# EAGLE board M_3x4._v4 (EAGLE 9.6.2)
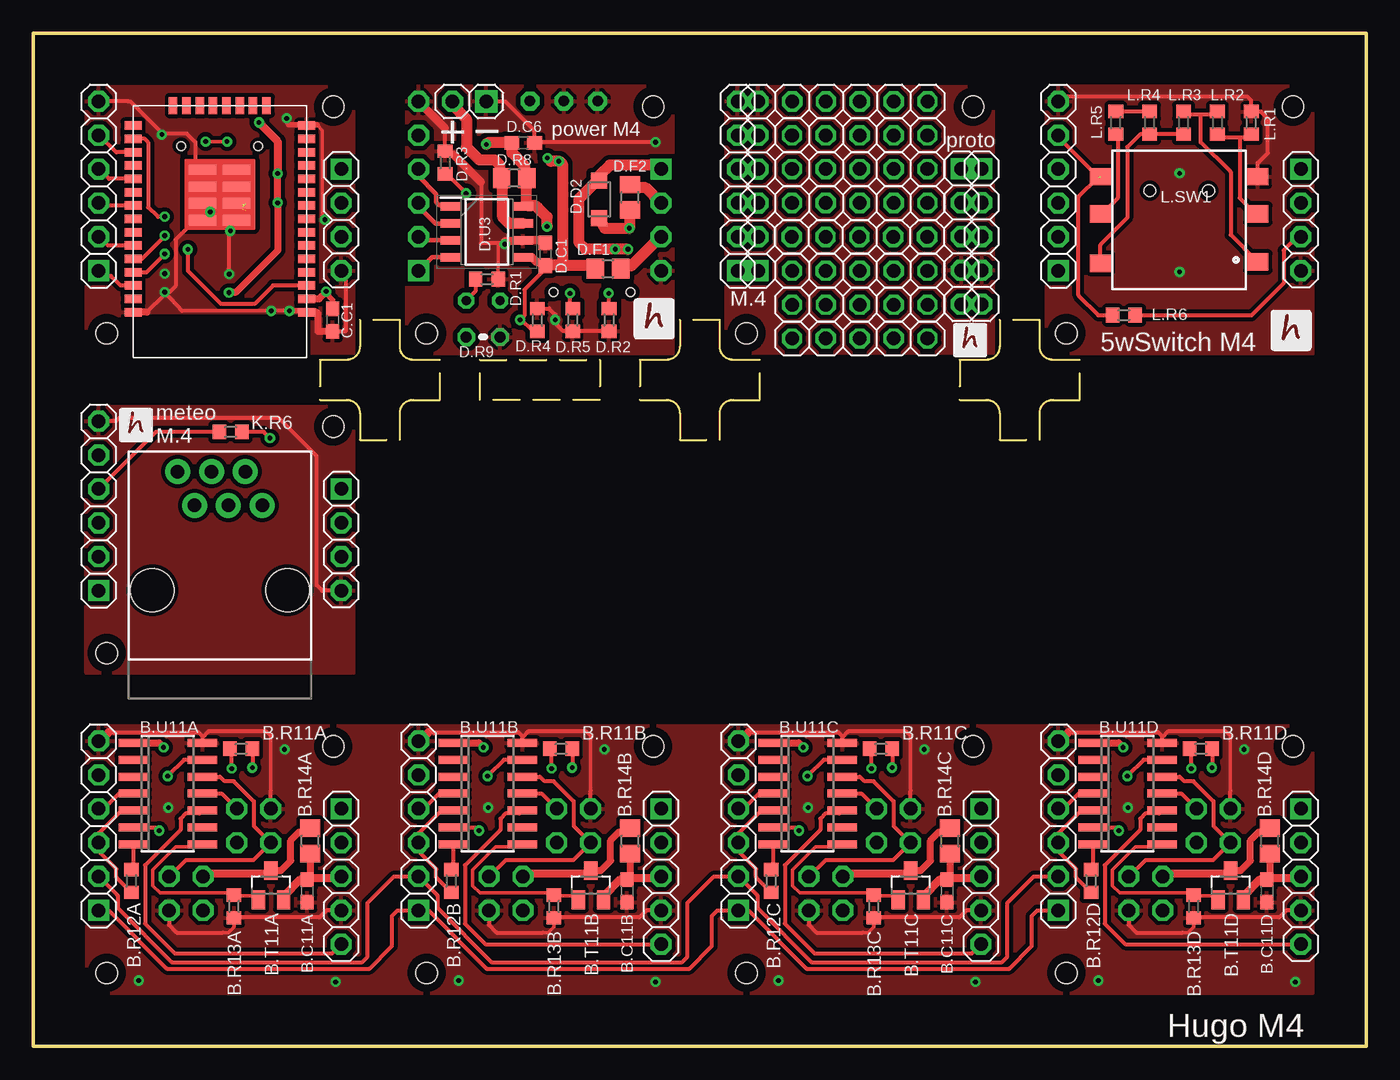
[diagram p0: board, top side]
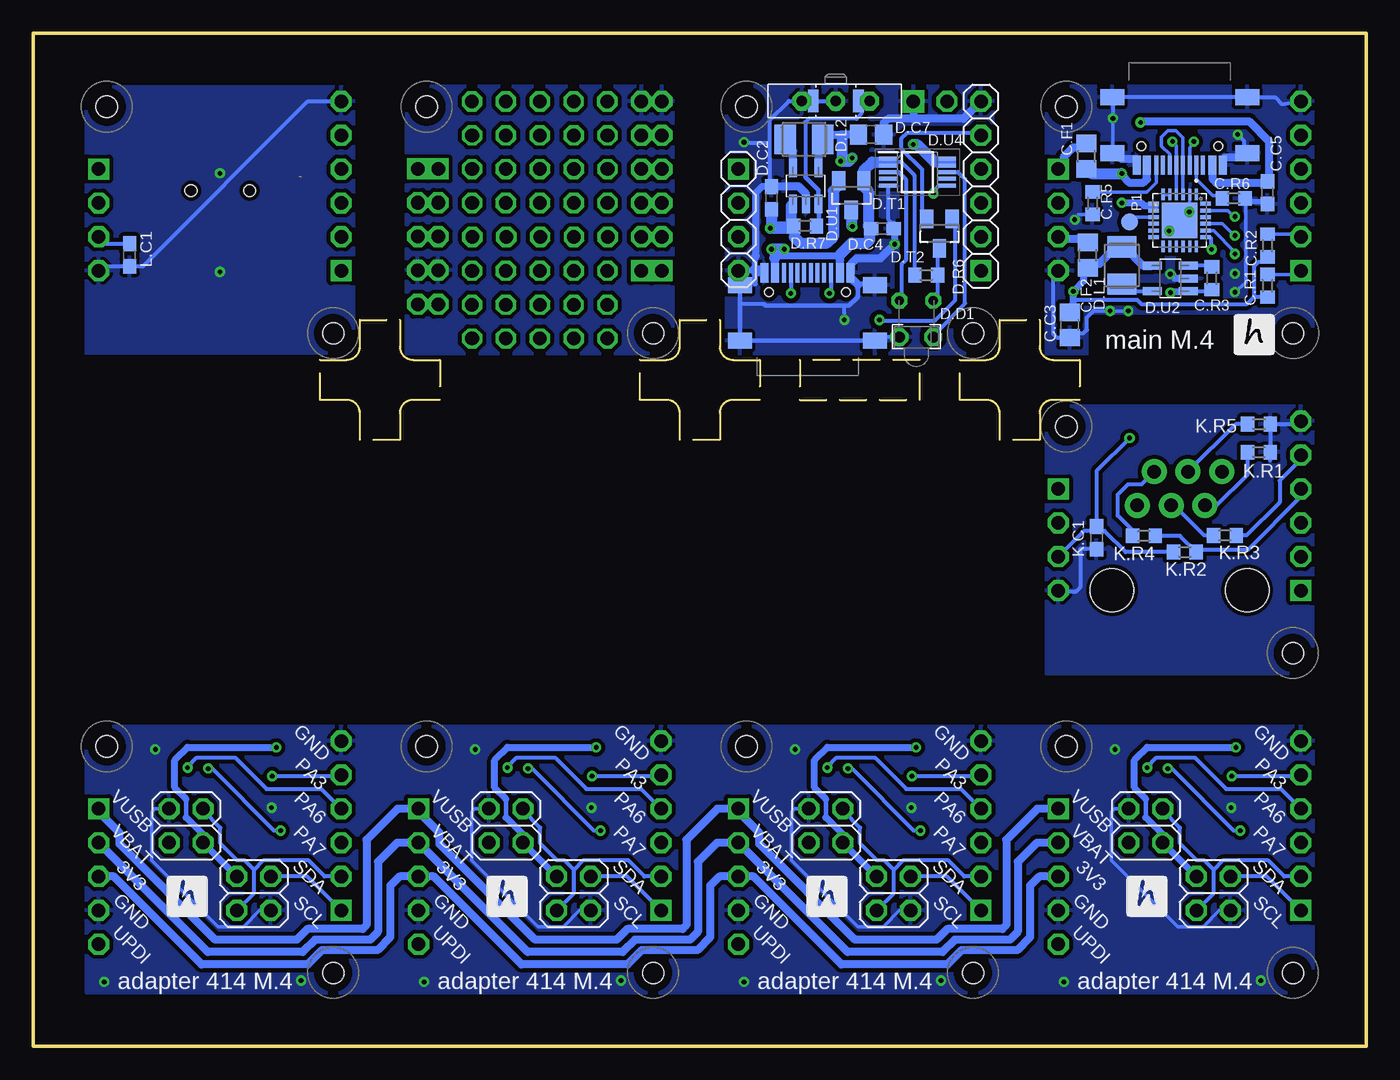
[diagram p1: board, bottom side, seen from below]

Size 100 x 76 mm. Coordinates in mm from the lower left corner, seen from the top.
Outline: 0,0 100,0 100,76 0,76 0,0
Copper layers (1*16): Top 0.035mm / dielectric 1.5mm / Bottom 0.035mm
Design rules "default *": minimum track width 10mil, minimum drill 0.35mm, track to track 6mil, track to pad 6mil, pad to pad 6mil, via to via 6mil, smd to smd 6mil, copper to edge 0mil, drill to drill 15mil, minimum pad ring 10mil, minimum via ring 8mil, stop-mask expansion 4mil, vias tented up to drill 0mil, thermal gap 10mil
Holes 1.6 mm at 5.5,53.5 22.5,70.5 29.5,53.5 46.5,70.5 70.5,70.5 53.5,53.5 77.5,53.5 94.5,70.5 22.5,46.5 5.5,29.5 77.5,5.5 94.5,22.5 5.5,5.5 22.5,22.5 29.5,5.5 46.5,22.5 53.5,5.5 70.5,22.5 77.5,5.5 94.5,22.5
tRestrict: area 21.5,69.5 to 23.5,71.5; area 4.5,52.5 to 6.5,54.5; area 45.5,69.5 to 47.5,71.5; area 28.5,52.5 to 30.5,54.5; area 69.5,69.5 to 71.5,71.5; area 52.5,52.5 to 54.5,54.5; area 93.5,69.5 to 95.5,71.5; area 76.5,52.5 to 78.5,54.5; area 21.5,45.5 to 23.5,47.5; area 4.5,28.5 to 6.5,30.5; area 21.5,21.5 to 23.5,23.5; area 4.5,4.5 to 6.5,6.5; 6 more areas
bRestrict: area 4.5,52.5 to 6.5,54.5; area 21.5,69.5 to 23.5,71.5; area 28.5,52.5 to 30.5,54.5; area 45.5,69.5 to 47.5,71.5; area 52.5,52.5 to 54.5,54.5; area 69.5,69.5 to 71.5,71.5; area 76.5,52.5 to 78.5,54.5; area 93.5,69.5 to 95.5,71.5; area 4.5,28.5 to 6.5,30.5; area 21.5,45.5 to 23.5,47.5; area 21.5,21.5 to 23.5,23.5; area 4.5,4.5 to 6.5,6.5; 6 more areas
Milling: 56 lines

## Footprints (pad centres in the part's own frame; a part is rotated, then mirrored left to right if it is on the bottom)
C0603 = smd 1.1 x 1: 1 -0.85,0; 2 0.85,0
1X06 = drill 1.016 pad 1.575 square: 1 -6.35,0 | drill 1.016 pad 1.575 octagon: 2 -3.81,0; 3 -1.27,0; 4 1.27,0; 5 3.81,0; 6 6.35,0
2X02 = drill 1.016 pad 1.575 octagon: 1 -1.27,-1.27; 2 -1.27,1.27; 3 1.27,-1.27; 4 1.27,1.27
1X05 = drill 1.016 pad 1.575 square: 1 -5.08,0 | drill 1.016 pad 1.575 octagon: 2 -2.54,0; 3 0,0; 4 2.54,0; 5 5.08,0
R0603 = smd 1 x 1.1: 1 -0.85,0; 2 0.85,0
FUSE = smd 1.3 x 1.5: 1 -0.95,0; 2 0.95,0
SO23 = smd 1 x 1.4: D 0,1.1; G -0.95,-1.1; S 0.95,-1.1
SO14 = smd 0.6 x 2.2: 1 -3.81,-2.6; 2 -2.54,-2.6; 3 -1.27,-2.6; 4 0,-2.6; 5 1.27,-2.6; 6 2.54,-2.6; 7 3.81,-2.6; 8 3.81,2.6; 9 2.54,2.6; 10 1.27,2.6; 11 0,2.6; 12 -1.27,2.6; 13 -2.54,2.6; 14 -3.81,2.6
C0805 = smd 1.3 x 1.5: 1 -0.95,0; 2 0.95,0
R0805 = smd 1.3 x 1.5: 1 -0.95,0; 2 0.95,0
TTGO-MICRO-32 = smd 1.27 x 0.635: 3V3 -6.5,5; EN -6.5,4; GND1 -6.5,6; GND2 -6.5,-8; GND3 6.5,6; IO0 6.5,-7; IO2 6.5,-8; IO4 6.5,-6; IO5 6.5,-3; IO12 -6.5,-7; IO14 -6.5,-6; IO16 6.5,-5; IO17 6.5,-4; IO18 6.5,-2; IO19 6.5,-1; IO21 6.5,1; IO22 6.5,4; IO23 6.5,5; IO25 -6.5,-3; IO26 -6.5,-4; IO27 -6.5,-5; IO32 -6.5,-1; IO33 -6.5,-2; IO34 -6.5,1; IO35 -6.5,0; NC 6.5,0; RXD0 6.5,2; TXD0 6.5,3; VN -6.5,2; VP -6.5,3 | smd 0.635 x 1.27: CLK 0.5,-9.5; CMD -0.5,-9.5; IO13 -3.5,-9.5; IO15 3.5,-9.5; SD0 1.5,-9.5; SD1 2.5,-9.5; SD2 -2.5,-9.5; SD3 -1.5,-9.5 | smd 2.032 x 0.762: GND4 -1.27,-0.889; GND5 1.27,-0.889; GND6 -1.27,-2.159; GND7 1.27,-2.159; GND8 -1.27,-3.429; GND9 -1.27,-4.699; GND10 1.27,-3.429; GND11 1.27,-4.699
LED_1.8 = drill 0.7 octagon: 1 -1.27,-0.4; 2 1.27,-0.4
SHOTKY_2.8 = smd 1.2 x 1.2: A -1.4,0; K 1.4,0
1X04 = drill 1.016 pad 1.575 square: 1 -3.81,0 | drill 1.016 pad 1.575 octagon: 2 -1.27,0; 3 1.27,0; 4 3.81,0
L3230M = smd 1.6 x 2.2: 1 -1.4,0; 2 1.4,0
1X02 = drill 1.016 pad 1.676 square: 1 -1.27,0 | drill 1.016 pad 1.575 octagon: 2 1.27,0
SWITCH = drill 0.8 pad 1.422 octagon: P$1 -2.54,0; P$2 0,0; P$3 2.54,0 | smd 0.8 x 1.7: P$4 -1.7,0; P$5 1.7,0
THERM = drill 0.813 octagon: 1 -1.27,0; 2 1.27,0
SOT32-5 = smd 0.6 x 1.4: BP 0.95,1.35; GND 0,-1.35; SHDN 0.95,-1.35; VIN -0.95,-1.35; VOUT -0.95,1.35
SOIC127P600X175-8N = smd 1.528 x 0.65: 1 -2.711,1.905; 2 -2.711,0.635; 3 -2.711,-0.635; 4 -2.711,-1.905; 5 2.711,-1.905; 6 2.711,-0.635; 7 2.711,0.635; 8 2.711,1.905
SOP50P490X110-10N = smd 1.4 x 0.3: 1 -2.2,1; 2 -2.2,0.5; 3 -2.2,0; 4 -2.2,-0.5; 5 -2.2,-1; 6 2.2,-1; 7 2.2,-0.5; 8 2.2,0; 9 2.2,0.5; 10 2.2,1
RJ11-6 = drill 1.016 pad 1.88: 1 -3.175,8.89; 2 -1.905,6.35; 3 -0.635,8.89; 4 0.635,6.35; 5 1.905,8.89; 6 3.175,6.35 | hole 3.251: -5.08,0; 5.08,0
5_WAY_SWITCH = smd 1.6 x 1.3: 1 -6,3; 2 -6,0.2; 3 -6,-3.5; 4 5.8,3; 5 5.8,0.2; 6 5.8,-3.4 | hole 0.9: 2.1,1.95; -2.3,1.95
B1,27 = smd 1.27 x 1.27: TP 0,0
QFN50P400X400X80-25N = smd 0.81 x 0.26: 1 -1.955,1.25; 2 -1.955,0.75; 3 -1.955,0.25; 4 -1.955,-0.25; 5 -1.955,-0.75; 6 -1.955,-1.25; 13 1.955,-1.25; 14 1.955,-0.75; 15 1.955,-0.25; 16 1.955,0.25; 17 1.955,0.75; 18 1.955,1.25 | smd 0.26 x 0.81: 7 -1.25,-1.955; 8 -0.75,-1.955; 9 -0.25,-1.955; 10 0.25,-1.955; 11 0.75,-1.955; 12 1.25,-1.955; 19 1.25,1.955; 20 0.75,1.955; 21 0.25,1.955; 22 -0.25,1.955; 23 -0.75,1.955; 24 -1.25,1.955 | smd 2.68 x 2.68: 25 0,0
USB-C = smd 0.6 x 1.45: A1B12 -3.235,3.825; A4B9 -2.46,3.825; B1A12 3.215,3.825; B4A9 2.44,3.825 | smd 0.3 x 1.45: A5 -1.26,3.825; A6 -0.26,3.825; A7 0.24,3.825; A8 1.24,3.825; B5 1.74,3.825; B6 0.74,3.825; B7 -0.76,3.825; B8 -1.76,3.825 | smd 1.8 x 1.2: SH1 -5.08,2.91; SH2 -5.08,-1.27; SH3 5.06,-1.27; SH4 5.06,2.91 | hole 0.65: 2.88,2.38; -2.9,2.38
1X5_AUTO = drill 1.016 octagon: 1 -5.08,0; 2 -2.54,0; 3 0,0; 4 2.54,0; 5 5.08,0

## Placement (x,y rotation side)
B.C11A  100n  [C0603]  20.54,11.65 270 top
B.C11B  100n  [C0603]  44.54,11.65 270 top
B.C11C  100n  [C0603]  68.54,11.65 270 top
B.C11D  100n  [C0603]  92.54,11.65 270 top
B.J1  [1X06]  28.9,16.54 90 top
B.J2  [2X02]  35.46,11.46 270 bottom
B.J3  [2X02]  40.54,16.54 270 bottom
B.J4  [1X05]  47.1,12.73 270 top
B.J5  [1X06]  52.9,16.54 90 top
B.J6  [2X02]  59.46,11.46 270 bottom
B.J7  [2X02]  64.54,16.54 270 bottom
B.J8  [1X05]  71.1,12.73 270 top
B.J9  [1X06]  76.9,16.54 90 top
B.J10  [2X02]  83.46,11.46 270 bottom
B.J11  [1X05]  23.1,12.73 270 top
B.J12  [1X06]  4.9,16.54 90 top
B.J13  [2X02]  11.46,11.46 270 bottom
B.J14  [2X02]  16.54,16.54 270 bottom
B.J15  [2X02]  88.54,16.54 270 bottom
B.J16  [1X05]  95.1,12.73 270 top
B.R11A  alt RX 0R  [R0603]  15.59,22.32 180 top
B.R11B  alt RX 0R  [R0603]  39.59,22.32 180 top
B.R11C  alt RX 0R  [R0603]  63.59,22.32 180 top
B.R11D  alt RX 0R  [R0603]  87.59,22.32 180 top
B.R12A  alt TX 0R  [R0603]  7.36,12.39 90 top
B.R12B  alt TX 0R  [R0603]  31.36,12.39 90 top
B.R12C  alt TX 0R  [R0603]  55.36,12.39 90 top
B.R12D  alt TX 0R  [R0603]  79.36,12.39 90 top
B.R13A  100k  [R0603]  15.06,10.48 270 top
B.R13B  100k  [R0603]  39.06,10.48 270 top
B.R13C  100k  [R0603]  63.06,10.48 270 top
B.R13D  100k  [R0603]  87.06,10.48 270 top
B.R14A  alt fuse or 0R  [FUSE]  20.77,15.4 90 top
B.R14B  alt fuse or 0R  [FUSE]  44.77,15.4 90 top
B.R14C  alt fuse or 0R  [FUSE]  68.77,15.4 90 top
B.R14D  alt fuse or 0R  [FUSE]  92.77,15.4 90 top
B.T11A  NX3008  [SO23]  17.83,12.09 0 top
B.T11B  NX3008  [SO23]  41.83,12.09 0 top
B.T11C  NX3008  [SO23]  65.83,12.09 0 top
B.T11D  NX3008  [SO23]  89.83,12.09 0 top
B.U11A  AT414  [SO14]  10.09,18.95 270 top
B.U11B  AT414  [SO14]  34.09,18.95 270 top
B.U11C  AT414  [SO14]  58.09,18.95 270 top
B.U11D  AT414  [SO14]  82.09,18.95 270 top
C.C1  100n  [C0603]  22.46,54.48 270 top
C.C3  22u  [C0805]  22.25,54.12 270 bottom
C.C5  1u  [C0603]  7.41,64.05 90 bottom
C.F1  0.5A  [R0805]  20.98,66.78 90 bottom
C.F2  0.5A  [R0805]  20.88,59.35 90 bottom
C.J2  [1X06]  4.9,64.54 90 top
C.R1  2k2  [R0603]  7.41,57.06 270 bottom
C.R2  2k2  [R0603]  7.41,60.08 270 bottom
C.R3  100k  [R0603]  11.58,57.62 270 bottom
C.R5  5K1  [R0603]  20.53,63.26 90 bottom
C.R6  5k1  [R0603]  9.95,63.61 180 bottom
C.U1  TTGO-MICRO-32  [TTGO-MICRO-32]  13.99,61.08 180 top
D.C1  100n  [C0603]  38.42,59.42 270 top
D.C2  4u7  [C0603]  44.62,63.64 270 bottom
D.C4  4u7  [C0603]  36.3,61.35 180 bottom
D.C6  4u7  [C0603]  36.75,67.79 180 top
D.C7  10u  [C0805]  37.14,68.4 180 bottom
D.D1  LED_1.8_FLIPPED  [LED_1.8]  33.75,55.55 180 bottom
D.D2  SHOTKY_2.8  [SHOTKY_2.8]  42.46,63.54 270 top
D.F1  0.5A  [R0805]  43.11,58.35 0 top
D.F2  1.1A  [R0805]  44.76,63.7 90 top
D.J2  [1X06]  28.9,64.54 90 bottom
D.J3  [1X04]  47.1,62 270 bottom
D.L1  2u2  [L3230M]  18.33,58.59 90 bottom
D.L2  2u2  [L3230M]  42.18,68.04 0 bottom
D.LIPOL  [1X02]  32.71,70.89 180 top
D.ON/OFF/RESET  SWITCH  [SWITCH]  39.8,70.92 0 bottom
D.R1  4k7  [R0603]  34.03,57.55 180 top
D.R2  5k1  [R0603]  43.2,54.5 270 top
D.R3  I=1/R (4k7 for 213mA, 2k2 for455mA )  [R0603]  30.9,66.31 270 top
D.R4  100k  [R0603]  37.81,54.5 90 top
D.R5  5k1  [R0603]  40.46,54.5 270 top
D.R6  3k3  [R0603]  33.01,57.85 180 bottom
D.R7  390k  [R0603]  42.1,61.53 0 bottom
D.R8  0.1  [R0805]  36.08,65.14 180 top
D.R9  TERM_10K  [THERM]  33.75,53.21 180 top
D.T1  FDV304  [SO23]  38.63,63.84 180 bottom
D.T2  NX3008  [SO23]  32.02,60.97 180 bottom
D.U1  LM3671_3.3  [SOT32-5]  42.04,64.55 0 bottom
D.U2  LM3671_3.3  [SOT32-5]  14.7,57.61 90 bottom
D.U3  INA219AIDR  [SOIC127P600X175-8N]  34.03,61.1 0 top
D.U4  MCP73833-AMI_UN  [SOP50P490X110-10N]  33.67,65.59 0 bottom
G.J1  [1X06]  76.9,64.54 90 top
G.J2  [1X04]  95.1,62 270 top
I.J3  [1X04]  23.1,38 270 top
J1  RJ11  [RJ11-6]  14,34.22 0 top
JP1  [1X04]  23.1,62 270 top
JP2  [1X06]  52.85,64.54 90 top
JP3  [1X06]  54.37,64.54 90 top
JP4  [1X05]  69.63,60.76 270 top
JP5  [1X06]  4.9,40.54 90 top
JP11  [1X05]  71.15,60.76 270 top
K.C1  100n  [C0603]  20.24,38.14 270 bottom
K.R1  1k  [R0603]  8.05,44.57 180 bottom
K.R2  4k7  [R0603]  13.61,37.08 0 bottom
K.R3  1k  [R0603]  10.6,38.32 180 bottom
K.R4  1k  [R0603]  16.67,38.3 180 bottom
K.R5  1k  [R0603]  8.04,46.68 180 bottom
K.R6  4k7  [R0603]  14.8,46.09 180 top
L.C1  100n  [C0603]  92.77,59.37 90 bottom
L.R1  1k  [R0603]  91.38,69.28 90 top
L.R2  1k  [R0603]  88.83,69.28 270 top
L.R3  2k2  [R0603]  86.3,69.28 90 top
L.R4  2k2  [R0603]  83.75,69.28 270 top
L.R5  2k2  [R0603]  81.22,69.28 270 top
L.R6  2k2  [R0603]  81.82,54.85 0 top
L.SW1  5_WAY_SWITCH  [5_WAY_SWITCH]  86.07,62.24 0 top
P1  TPB1,27  [B1,27]  17.74,61.87 0 bottom
U1  CP2104-F03-GM  [QFN50P400X400X80-25N]  13.99,61.96 270 bottom
U$1  USB-C  [USB-C]  14,69.93 180 bottom
U$2  USB-C  [USB-C]  41.91,54.2 0 bottom
U$3  PINHD-1X5_AUTO  [1X5_AUTO]  62.01,70.89 0 top
U$4  PINHD-1X5_AUTO  [1X5_AUTO]  62,68.35 0 top
U$5  PINHD-1X5_AUTO  [1X5_AUTO]  62,65.81 0 top
U$6  PINHD-1X5_AUTO  [1X5_AUTO]  62,63.27 0 top
U$7  PINHD-1X5_AUTO  [1X5_AUTO]  61.97,60.73 0 top
U$8  PINHD-1X5_AUTO  [1X5_AUTO]  62,58.19 0 top
U$9  PINHD-1X5_AUTO  [1X5_AUTO]  62,55.64 0 top
U$10  PINHD-1X5_AUTO  [1X5_AUTO]  62,53.1 0 top

## Library data of the parts
B.C11A B.C11B B.C11C B.C11D C.C1 C.C3 C.C5 D.C1 D.C2 D.C4 D.C6 D.C7 K.C1 L.C1 = rcl; SPICEPREFIX: C
B.J1-B.J16 C.J2 D.J2 D.J3 D.LIPOL G.J1 G.J2 I.J3 JP1-JP5 JP11 U$3-U$10 = pinhead2
B.R11A B.R11B B.R11C B.R11D B.R12A B.R12B B.R12C B.R12D B.R13A B.R13B B.R13C B.R13D C.F1 C.F2 C.R1-C.R3 C.R5 C.R6 D.F1 D.F2 D.R1-D.R8 K.R1-K.R6 L.R1-L.R6 = rcl; SPICEPREFIX: R
B.R14A B.R14B B.R14C B.R14D B.T11A B.T11B B.T11C B.T11D C.U1 D.D1 D.D2 D.ON/OFF/RESET D.R9 D.T1 D.T2 L.SW1 U$1 U$2 = hugo
B.U11A B.U11B B.U11C B.U11D = atmel
D.L1 D.L2 = rcl; SPICEPREFIX: L
D.U1 D.U2 = !stavebnice03
D.U3 = SamacSys_Parts; DESCRIPTION: 26-V, Bidirectional, Zero-Drift, High-Side, I2C Out Current/Power Monitor; HEIGHT: 1.75mm; MANUFACTURER_NAME: Texas Instruments; MANUFACTURER_PART_NUMBER: INA219AIDR; MOUSER_PART_NUMBER: 595-INA219AIDR; MOUSER_PRICE-STOCK: https://www.mouser.co.uk/ProductDetail/Texas-Instruments/INA219AIDR?qs=XGzIaZb%2FFYIE5YcOHTnKDA%3D%3D
D.U4 = SamacSys_Parts; DESCRIPTION: Microchip MCP73833-AMI/UN, Battery Charge Controller Lithium-Ion, Lithium-Polymer, 10-Pin MSOP; HEIGHT: 1.1mm; MANUFACTURER_NAME: Microchip; MANUFACTURER_PART_NUMBER: MCP73833-AMI/UN; MOUSER_PART_NUMBER: 579-MCP73833-AMI/UN; MOUSER_PRICE-STOCK: https://www.mouser.co.uk/ProductDetail/Microchip-Technology/MCP73833-AMI-UN?qs=Fxu3fLyJv8fd%2FGnsUSC9lg%3D%3D
J1 = SparkFun-Connectors; PROD_ID: CONN-08590; SF_ID: PRT-00132
P1 = testpad
U1 = CP2104; AVAILABILITY: Unavailable; DESCRIPTION: USB Bridge, USB to UART USB 2.0 UART Interface 24-QFN (4x4); MF: Silicon Labs; MP: CP2104; PACKAGE: QFN-24 Silicon Labs; PRICE: None

## Nets
3V3F: D.F1.2 D.J3.3
GND: C.C1.2 C.C3.2 C.C5.1 C.J2.6 C.R5.1 C.R6.1 C.U1.GND1 C.U1.GND2 C.U1.GND3 C.U1.GND4 C.U1.GND5 C.U1.GND6 C.U1.GND7 C.U1.GND8 C.U1.GND9 C.U1.GND10 C.U1.GND11 D.U2.GND JP1.4 U1.2 U1.25 U$1.A1B12 U$1.B1A12 U$1.SH1 U$1.SH2 U$1.SH3 U$1.SH4
GND1: D.C1.1 D.C2.1 D.C4.1 D.C6.1 D.C7.1 D.J2.6 D.J3.4 D.LIPOL.1 D.ON/OFF/RESET.P$1 D.ON/OFF/RESET.P$2 D.ON/OFF/RESET.P$4 D.R1.1 D.R2.2 D.R3.1 D.R4.2 D.R5.2 D.R9.1 D.U1.GND D.U3.6 D.U4.5 U$2.A1B12 U$2.B1A12 U$2.SH1 U$2.SH2 U$2.SH3 U$2.SH4
GND2: JP2.6 JP3.6 JP4.4 JP11.4
GND3: G.J1.6 G.J2.4 L.C1.1 L.R1.2 L.SW1.4
GND4: I.J3.4 JP5.6 K.C1.2 K.R1.1 K.R5.1
GND6: B.C11A.2 B.C11B.2 B.C11C.2 B.C11D.2 B.J1.6 B.J2.4 B.J3.1 B.J4.4 B.J5.6 B.J6.4 B.J7.1 B.J8.4 B.J9.6 B.J10.4 B.J11.4 B.J12.6 B.J13.4 B.J14.1 B.J15.1 B.J16.4 B.R13A.2 B.R13B.2 B.R13C.2 B.R13D.2 B.U11A.14 B.U11B.14 B.U11C.14 B.U11D.14
IN+: D.LIPOL.2 D.R8.2 D.U3.7
IN-: D.C6.2 D.R8.1 D.T1.D D.U3.8 D.U4.9 D.U4.10
N$1: U1.4 U$1.A7 U$1.B7
N$2: U1.3 U$1.A6 U$1.B6
N$3: C.R6.2 U$1.A5
N$4: C.R5.2 U$1.B5
N$5: C.F2.2 JP1.3
N$6: C.F1.2 JP1.1
N$7: P1.TP U1.9
N$8: U1.5 U1.6
N$9: D.L2.1 D.U1.VOUT
N$10: D.L1.1 D.U2.VOUT
N$11: C.R3.1 D.U2.SHDN
N$12: C.J2.5 C.U1.IO4
N$13: C.J2.4 C.U1.IO17
N$14: C.J2.3 C.U1.IO18
N$15: D.ON/OFF/RESET.P$3 D.ON/OFF/RESET.P$5 D.R7.2 D.U1.SHDN
N$16: D.R5.1 U$2.B5
N$17: D.R2.1 U$2.A5
N$18: D.R3.2 D.U4.6
N$19: D.R9.2 D.U4.8
N$20: D.J2.5 D.T2.S
N$21: JP2.5 JP3.5
N$22: JP2.4 JP3.4
N$24: JP2.3 JP3.3
N$25: JP2.2 JP3.2
N$27: JP2.1 JP3.1
N$28: JP4.5 JP11.5
N$29: JP4.2 JP11.2
N$30: JP4.1 JP11.1
N$31: JP4.3 JP11.3
N$32: L.R1.1 L.R2.2 L.SW1.5
N$33: L.R2.1 L.R3.2 L.SW1.6
N$34: L.R3.1 L.R4.2 L.SW1.3
N$35: L.R5.2 L.SW1.2
N$36: G.J1.5 L.R6.1 L.SW1.1
N$37: L.R4.1 L.R5.1
N$38: JP5.5 K.R3.1
N$39: JP5.4 K.R2.2 K.R4.1 K.R6.2
N$40: J1.5 K.R4.2
N$41: J1.4 K.R3.2
N$42: J1.3 K.R5.2
N$43: J1.2 K.R1.2
N$44: B.R12A.2 B.U11A.7
N$45: B.R11A.2 B.U11A.6
N$46: B.R13A.1 B.T11A.G B.U11A.8
N$47: B.R12C.2 B.U11C.7
N$48: B.C11A.1 B.C11B.1 B.C11C.1 B.C11D.1 B.J4.3 B.J8.3 B.J11.3 B.J16.3 B.R14A.1 B.R14B.1 B.R14C.1 B.R14D.1 B.T11A.S B.T11B.S B.T11C.S B.T11D.S
N$49: B.R12B.2 B.U11B.7
N$50: B.R11B.2 B.U11B.6
N$51: B.R13B.1 B.T11B.G B.U11B.8
N$52: B.R11C.2 B.U11C.6
N$53: B.R13C.1 B.T11C.G B.U11C.8
N$55: B.R12D.2 B.U11D.7
N$56: B.R11D.2 B.U11D.6
N$57: B.R13D.1 B.T11D.G B.U11D.8
PA1: B.J12.5 B.U11A.13
PA2: B.J12.4 B.R11A.1 B.U11A.4
PA3: D.D1.1 D.R1.2 D.R6.1 D.T2.D
PA4: B.J12.3 B.R12A.1 B.U11A.5
PA5: B.J1.5 B.U11B.13
PA6: D.J2.4 D.U3.1
PA7: D.J2.3 D.U3.2
PA8: B.J1.4 B.R11B.1 B.U11B.4
PA9: B.J1.3 B.R12B.1 B.U11B.5
PA10: B.J5.5 B.U11C.13
PA11: B.J5.4 B.R11C.1 B.U11C.4
PA12: B.J5.3 B.R12C.1 B.U11C.5
PA13: B.J9.5 B.U11D.13
PA14: B.J9.4 B.R11D.1 B.U11D.4
PA15: B.J9.3 B.R12D.1 B.U11D.5
PROG: C.U1.IO0 U1.23
RESET: C.U1.EN U1.19
RX: C.U1.TXD0 U1.20
SCL: C.J2.1 C.R1.1 C.U1.IO22
SCL1: D.J2.1 D.U3.4
SCL2: B.J1.1 B.J2.2 B.J3.3 B.J5.1 B.J6.2 B.J7.3 B.J9.1 B.J10.2 B.J12.1 B.J13.2 B.J14.3 B.J15.3 B.U11A.12 B.U11B.12 B.U11C.12 B.U11D.12
SDA: C.J2.2 C.R2.1 C.U1.IO21
SDA1: D.J2.2 D.U3.3
SDA2: B.J1.2 B.J2.3 B.J3.2 B.J5.2 B.J6.3 B.J7.2 B.J9.2 B.J10.3 B.J12.2 B.J13.3 B.J14.2 B.J15.2 B.U11A.11 B.U11B.11 B.U11C.11 B.U11D.11
STAT1: D.D1.2 D.U4.3
TX: C.U1.RXD0 U1.21
UPDI: B.J11.5 B.U11A.10
UPDI1: B.J4.5 B.U11B.10
UPDI2: B.J8.5 B.U11C.10
UPDI3: B.J16.5 B.U11D.10
VBAT: B.J4.2 B.J8.2 B.J11.2 B.J16.2
VBATF: D.F2.2 D.J3.2
VCC: C.C1.1 C.C3.1 C.F2.1 C.R1.2 C.R2.2 C.U1.3V3 D.L1.2 D.U2.BP
VCC1: D.C1.2 D.C7.2 D.F1.1 D.L2.2 D.R4.1 D.T2.G D.U1.BP D.U3.5
VCC2: G.J2.3 L.C1.2 L.R6.2
VCC3: I.J3.3 K.C1.1 K.R2.1 K.R6.1
VCC4: B.J13.1 B.J14.4 B.R14A.2 B.T11A.D B.U11A.1
VCC5: B.J2.1 B.J3.4 B.R14B.2 B.T11B.D B.U11B.1
VCC6: B.J6.1 B.J7.4 B.R14C.2 B.T11C.D B.U11C.1
VCC7: B.J10.1 B.J15.4 B.R14D.2 B.T11D.D B.U11D.1
VMOT: D.C2.2 D.D2.K D.F2.1 D.R7.1 D.T1.S D.U1.VIN
VUSB: C.C5.2 C.F1.1 C.R3.2 D.U2.VIN U1.7 U1.8 U$1.A4B9 U$1.B4A9
VUSB1: D.C4.2 D.D2.A D.J3.1 D.R6.2 D.T1.G D.U4.1 D.U4.2 U$2.A4B9 U$2.B4A9
VUSB2: B.J4.1 B.J8.1 B.J11.1 B.J16.1

## Tracks (layer width: path | path; a pad name or v marks a point on that pad's centre or on a via)
3V3F
  Top 0.813: D.F1.2 44.27,58.55 44.87,58.55 47.05,60.73 D.J3.3
GND  (via drill 0.35)
  Top 0.254: 21.29,69.13 21.67,68.74 21.67,62.28 21.87,62.09 v21.87,62.02 | 12.67,61.71 12.92,61.97 13.3,62.34 13.97,62.34 14.6,61.71 | v14.7,57.93
  Top 0.305: 19.15,69.13 19.01,69.27 v19.01,69.62 19.01,69.47 | 20.44,69.13 C.U1.GND2 | v9.85,56.59 9.77,56.32 8.52,55.07 | C.U1.GND3 | 9.73,68.5 v9.64,68.41 | v9.64,68.41 9.64,68.54 7.3,70.88 7.11,70.89 C.J2.6 | 22.46,53.65 C.C1.2 23.41,53.63 23.41,57.88 JP1.4 | C.U1.GND1 20.38,54.96 20.35,54.96 20.25,55.07 20.68,55.05 | v9.85,56.59 11.15,55.16 v17.85,55.18 17.86,55.17 18,55.18 v19.21,55.18 | v9.64,68.41 9.71,68.47 11.51,68.47 12.15,67.83 12.15,66.29 13.23,65.21 13.23,64.26 13.23,63.07 | 13.23,63.07 13.23,62.93 13.23,61.63 14.7,63.1 v14.7,57.93 | 15.82,61.76 14.65,61.76 14.6,61.71 12.67,61.71 | 12.92,61.97 C.U1.GND5 | v14.7,57.93 14.55,58.12 | 13.23,63.07 10.67,60.51 10.67,57.02 10.23,56.59 v9.85,56.59
  Top 0.406: 19.15,69.13 20.44,69.13 21.29,69.13 | 20.68,55.05 19.89,55.18 v19.21,55.18
  Top 0.508: 8.52,55.07 C.U1.GND3 | C.C1.2 21.36,53.63 21.36,54.98 21.26,55.08 C.U1.GND1 20.45,55.11 | C.U1.GND10 12.98,64.5 13.23,64.26 | C.U1.GND7 12.92,63.23 13.23,62.93
  Bottom 0.254: v9.85,56.59 9.02,57.29 9.02,63.53 C.R6.1 8.85,63.36 | v19.01,69.62 19.01,67.07 U$1.SH4 | v21.87,62.02 21.87,62.13 21.59,62.41 C.R5.1 | D.U2.GND 13.38,57.64 | U1.2 13.25,62.9 13.27,62.88 v13.27,62.6 13.36,62.6 U1.25 | C.C5.1 7.57,63.36
  Bottom 0.305: C.C3.2 22.18,53.17 | 19,69.62 v19.01,69.62 | U$1.A1B12 10.77,66.51 10.74,66.51 | 10.59,66.68 10.59,66.51 10.74,66.51 | 10.74,66.51 10.74,66.33 | v9.64,68.41 9.18,67.94 9.18,66.9 | v19.01,69.62 19.01,71.15 U$1.SH3 U$1.SH2 6.84,71.2 6.33,70.7 C.J2.6 | C.C3.2 21.93,53.49 21.22,53.49 20.95,53.76 20.95,54.68 20.46,55.16 v17.85,55.18 | 18.82,67.02 U$1.SH4 18.79,67.02 18.34,66.56 | U$1.SH1 9.26,66.68 | 14.2,62.16 U1.25 | 13.21,62.96 13.96,62.21 | JP1.4 23.5,57.79 23.5,53.46 23.21,53.17 C.C3.2 | 19.06,69.57 v19.01,69.62 | C.C5.1 7.22,63.2 7.15,63.13 | U$1.B1A12 17.21,66.55 17.23,66.56
  Bottom 0.406: 8.85,63.36 7.57,63.36
  Bottom 0.508: D.U2.GND 13.37,57.62 14.37,57.62 14.56,57.93 v14.7,57.93 | U1.25 14.25,61.71 14.6,61.71
  Bottom 0.61: 17.23,66.56 18.34,66.56 | 9.26,66.68 10.59,66.68
  other vias: 14.78,61.18 9.85,57.97
  pour Top (isolate 0.305): 4,52 4,72 24,72 24,52
  pour Bottom (isolate 0.305): 4,72 24,72 24,52 4,52
GND1  (via drill 0.35)
  Top 0.254: D.R1.1 34.88,60.23 34.89,60.24
  Top 0.305: D.U3.6 36.73,60.45 | D.C1.1 38.66,60.51 | D.R2.2 43.2,53.67 D.R5.2 39.75,53.67 39.15,54.27 v39.15,54.5 39.15,54.9 38.71,55.35 D.R4.2 | D.LIPOL.1 35.41,70.89 37.6,68.7 D.C6.1 37.65,67.83 v46.68,67.83 | D.J2.6 | 30.87,68.92 30.87,67.19 D.R3.1 31.15,66.91 31.52,66.91 | 35.38,60.39 35.48,60.29 v35.37,60.18 35.32,60.24 34.89,60.24 33.58,60.24 33.58,64.85
  Top 0.61: D.C1.1 38.23,60.47 D.U3.6 36.66,60.39 35.38,60.39 | 30.87,68.92 D.J2.6 | 31.52,66.91 33.58,64.85
  Bottom 0.254: 33.65,69.47 33.53,69.58 | 35.96,64.59 D.U4.5 | D.C2.1 44.65,64.53 | 44.79,64.41 44.8,64.42
  Bottom 0.305: 45.18,55.7 46.99,55.7 46.99,55.69 | 44.77,67.78 44.77,69.47 43.31,70.92 D.ON/OFF/RESET.P$1 | 44.77,67.78 44.77,64.43 | 44.2,64.47 44.55,64.82 44.62,64.75 D.C2.1 44.73,64.49 44.8,64.42 | 34.25,71.16 D.LIPOL.1 | 39.15,54.63 v39.15,54.5 | v39.15,54.5 39.13,54.47 | D.ON/OFF/RESET.P$1 D.ON/OFF/RESET.P$2 | D.ON/OFF/RESET.P$4 D.ON/OFF/RESET.P$1 | v46.68,67.83 46.63,67.78 44.77,67.78 | D.U4.5 35.88,62.07 35.45,61.65 | v39.15,54.5 39.15,55.57 | D.R9.1 36.57,53.21 U$2.SH3
  Bottom 0.356: 33.98,69.46 D.LIPOL.1 | U$2.SH3 U$2.SH2 46.99,55.69 U$2.SH1 | 38.7,57.7 U$2.B1A12 | 45.18,55.7 45.05,55.57 39.15,55.57 | 40.02,55.57 38.79,55.57 38.15,56.21 38.15,56.95 38.21,57.01 38.11,57.11 38.01,57.21 36.95,57.21 U$2.SH4
  Bottom 0.406: 46.01,58.35 45.87,58.48 45.87,59.21 | 46.01,58.35 46.16,58.19 | U$2.A1B12 45.32,58.2 45.34,58.19 | 46.16,58.19 D.J3.4 47.1,57.22 | 46.16,58.19 45.81,58.19 | 46.01,58.35 45.84,58.18 45.84,57.22
  Bottom 0.508: D.C4.1 35.45,61.65 | 35.45,61.65 D.C4.1 | 35.41,60.15 v35.37,60.18 35.37,61.42 D.C4.1 | 45.79,59.29 45.79,64.04 45.31,64.53 44.65,64.53
  Bottom 0.61: D.LIPOL.1 33.98,69.58 33.53,69.58 30.21,69.58 D.J2.6 | D.U1.GND 42.04,63.97 42.56,64.49 44.17,64.49 44.2,64.47 | 44.77,64.43 44.79,64.41 | 44.8,64.42 44.71,64.43 | 45.87,59.21 45.79,59.29 | 38.11,57.11 38.7,57.7 | 36.31,57.34 36.62,57.34 U$2.SH4 36.72,57.24 | 47.1,57.22 U$2.SH1 | D.C7.1 36.19,69.27 35.88,69.58 34.01,69.58 | v35.37,60.18 36.44,59.12 38.22,59.12 38.65,58.69 38.65,58.08 U$2.B1A12
  Bottom 0.813: 35.52,61.42 D.C4.1 | 45.81,58.19 45.34,58.19
  pour Top (isolate 0.356): 28,72 28,52 48,52 48,72
  pour Bottom (isolate 0.356, rank 3): 28,72 48,72 48,52 28,52
GND2
  pour Top (isolate 0.305): 52,72 72,72 72,52 52,52
  pour Bottom (isolate 0.305): 52,72 72,72 72,52 52,52
GND3  (via drill 0.35)
  Top 0.305: L.SW1.4 91.87,66.27 92.62,67.02 92.62,69.61 92.1,70.13 L.R1.2 91.38,70.96 91.1,71.24 77.25,71.24 G.J1.6
  Bottom 0.305: G.J2.4 94.77,58.52 L.C1.1 91.77,58.52 79.4,70.89 G.J1.6
  other vias: 86,65.5 86,58.1
  pour Top (isolate 0.305): 76,72 76,52 96,52 96,72
  pour Bottom (isolate 0.305): 76,72 76,52 96,52 96,72
GND4
  Top 0.305: I.J3.4 21.65,34.19 21.24,34.6 21.24,44.3 18.39,47.14 6.45,47.14 6.2,46.89 JP5.6
  Bottom 0.305: K.C1.2 21.45,37.29 21.45,34.42 21.75,34.12 23.03,34.12 I.J3.4 | JP5.6 5.11,46.68 K.R5.1 7.19,44.58 K.R1.1 7.2,43.97
  pour Top (isolate 0.305): 3.97,48 24,48 24,28 3.97,28
  pour Bottom (isolate 0.305): 4,48 24,48 24,28 4,28
GND6  (via drill 0.35)
  Top 0.254: 15.08,9.66 B.R13A.2 15.06,8.95 14.62,8.51 14.21,8.51 | 17.81,19.17 17.81,23.29 17.48,23.62 | 39.08,9.66 B.R13B.2 39.06,8.95 38.62,8.51 38.21,8.51 | 41.81,19.17 41.81,23.29 41.48,23.62 | 63.08,9.66 B.R13C.2 63.06,8.95 62.62,8.51 62.21,8.51 | 65.81,19.17 65.81,23.29 65.48,23.62 | 87.08,9.66 B.R13D.2 87.06,8.95 86.62,8.51 86.21,8.51 | 89.81,19.17 89.81,23.29 89.48,23.62
  Top 0.305: B.J12.6 4.98,22.89 | 5.64,23.55 12.39,23.55 12.69,23.25 B.U11A.14 12.69,23.17 13.13,23.62 17.48,23.62 | B.J14.1 17.81,19.17 | 14.21,8.51 10.77,8.51 10.19,9.09 B.J13.4 | B.J11.4 22.01,10.19 21.47,9.66 15.08,9.66 | B.J1.6 28.98,22.89 | 29.64,23.55 36.39,23.55 36.69,23.25 B.U11B.14 36.69,23.17 37.13,23.62 41.48,23.62 | B.J3.1 41.81,19.17 | 38.21,8.51 34.77,8.51 34.19,9.09 B.J2.4 | B.J4.4 46.01,10.19 45.47,9.66 39.08,9.66 | B.J5.6 52.98,22.89 | 53.64,23.55 60.39,23.55 60.69,23.25 B.U11C.14 60.69,23.17 61.13,23.62 65.48,23.62 | B.J7.1 65.81,19.17 | 62.21,8.51 58.77,8.51 58.19,9.09 B.J6.4 | B.J8.4 70.01,10.19 69.47,9.66 63.08,9.66 | B.J9.6 76.98,22.89 | 77.64,23.55 84.39,23.55 84.69,23.25 B.U11D.14 84.69,23.17 85.14,23.62 89.48,23.62 | B.J15.1 89.81,19.17 | 86.21,8.51 82.77,8.51 82.19,9.09 B.J10.4 | B.J16.4 94.01,10.19 93.47,9.66 87.08,9.66
  Top 0.61: 4.98,22.89 5.64,23.55 | 28.98,22.89 29.64,23.55 | 52.98,22.89 53.64,23.55 | 76.98,22.89 77.64,23.55
  Bottom 0.254: B.J13.4 11.01,10.19 12.22,8.97 14.12,8.97 19.11,13.95 19.11,17.58 18.88,17.81 B.J14.1 | B.J2.4 35.01,10.19 36.23,8.97 38.12,8.97 43.1,13.95 43.1,17.58 42.88,17.81 B.J3.1 | B.J6.4 59.01,10.19 60.23,8.97 62.12,8.97 67.11,13.95 67.11,17.58 66.88,17.81 B.J7.1 | B.J10.4 83.01,10.19 84.22,8.97 86.12,8.97 91.11,13.95 91.11,17.58 90.88,17.81 B.J15.1
  other vias: 7.91,4.92 10.13,17.9 22.68,4.82 18.84,22.27 31.91,4.92 34.13,17.9 46.68,4.82 42.84,22.27 55.91,4.92 58.13,17.9 70.68,4.82 66.84,22.27 79.91,4.92 82.13,17.9 94.68,4.82 90.84,22.27
  pour Bottom (isolate 0.305): 4,24 4,4 95.98,4 95.98,24
  pour Top (isolate 0.305): 4,24 4,4 95.98,4 95.98,24
IN+
  Top 0.305: 35.16,62.14 35.22,62.19
  Top 0.813: D.LIPOL.2 31.44,70.64 32.5,69.57 32.5,67.46 33.46,66.51 34.62,66.51 34.97,66.15 34.97,65.3 D.R8.2 35.22,65.05 35.22,62.19 35.68,61.74 D.U3.7
IN-  (via drill 0.35)
  Top 0.305: 37.84,62.93 37.71,63.06 | 37.33,63.06 37.13,63.06 | 37.05,63.13 36.87,63.13 D.U3.8
  Top 0.813: v33.98,67.67 34.09,67.79 D.C6.2 35.9,67.03 36.85,66.08 36.85,65.32 D.R8.1 | D.R8.1 37.11,65.15 | v38.55,61.51 38.55,62.22 37.84,62.93 | D.R8.1 36.97,65.09 36.97,63.21 37.05,63.13 37.13,63.06 | 37.71,63.06 37.33,63.06
  Bottom 0.254: D.U4.9 31.41,66.15 31.41,66.59
  Bottom 0.305: 31.18,66.36 31.41,66.59 D.U4.10
  Bottom 0.813: D.T1.D 38.61,62.72 38.61,61.57 v38.55,61.51 | v33.98,67.67 33.72,67.67 32.41,66.36 31.18,66.36
N$1  (via drill 0.35)
  Top 0.254: v14.53,67.88 v12.93,67.88
  Top 0.305: v14.54,67.88 v14.53,67.88
  Bottom 0.254: U$1.B7 13.24,67.43 v12.93,67.88 | v14.54,67.88 14.24,67.58 U$1.A7 U1.4
N$2
  Bottom 0.254: U1.3 13.74,63.92 U$1.A6 13.74,68.16 14.28,68.69 14.88,68.69 15.35,68.22 15.35,67.54 14.75,66.94 14.75,66.11 U$1.B6
N$3
  Bottom 0.254: U$1.A5 12.74,65.05 11.52,63.83 11.02,63.83 C.R6.2
N$4
  Bottom 0.254: U$1.B5 15.74,64.78 16.45,64.07 20.5,64.07 C.R5.2
N$5
  Bottom 0.305: C.F2.2 21.18,60.6
  Bottom 0.508: 22.97,60.6 JP1.3
  Bottom 0.61: 22.97,60.6 21.18,60.6
N$6
  Bottom 0.61: C.F1.2 21.27,67.44 21.98,67.44 22.71,66.71 22.71,66.2 JP1.1
N$7
  Bottom 0.254: U1.9 17.39,62.21 P1.TP
N$8
  Bottom 0.254: U1.5 U1.6
N$9
  Bottom 0.61: D.U1.VOUT 42.99,67.16 43.58,67.75 D.L2.1
N$10
  Bottom 0.305: 16.08,56.66 D.U2.VOUT 16.06,56.64 17.79,56.64 D.L1.1
N$11
  Bottom 0.305: D.U2.SHDN 13.3,58.6 11.71,58.6 C.R3.1
N$12
  Top 0.305: C.U1.IO4 6.22,67.08 C.J2.5
N$13
  Top 0.305: C.U1.IO17 5.68,65.08 C.J2.4
N$14
  Top 0.305: C.U1.IO18 5.14,63.08 C.J2.3
N$15
  Bottom 0.305: 42.08,65.22 42.08,69.35 41.83,69.59 38.24,69.59 37.88,69.95 D.ON/OFF/RESET.P$5 D.ON/OFF/RESET.P$3
  Bottom 0.356: D.R7.2 41.07,61.71 41.07,63.18 D.U1.SHDN 41.09,64.23 42.08,65.22
N$16  (via drill 0.35)
  Top 0.305: D.R5.1 40.27,55.56 v40.27,56.5
  Bottom 0.305: U$2.B5 40.17,56.6 v40.27,56.5
N$17  (via drill 0.35)
  Top 0.305: v43.17,56.5 43.17,55.4 D.R2.1
  Bottom 0.305: U$2.A5 v43.17,56.5
N$18  (via drill 0.35)
  Top 0.305: v32.47,63.99 32.47,64.02 31.02,65.46 D.R3.2
  Bottom 0.254: D.U4.6 31.49,64.58
  Bottom 0.305: 32.46,63.98 v32.47,63.99 32.47,64.16 32.05,64.59 D.U4.6
N$19
  Bottom 0.305: D.R9.2 32.48,53.34 30.09,55.73 30.09,65.06 30.62,65.59 D.U4.8
N$20
  Bottom 0.305: D.J2.5 29.09,68.54 34.43,68.54 34.86,68.12 34.86,67.32 33.33,65.79 33.33,62.43 D.T2.S
N$21
  Bottom 0.61: JP3.5 54.3,68.42 52.86,68.36 JP2.5
N$22
  Bottom 0.61: JP3.4 52.89,65.75 JP2.4
N$24
  Bottom 0.61: JP3.3 53.17,63.27 52.86,63.26 JP2.3
N$25
  Bottom 0.61: JP3.2 53.17,60.73 52.86,60.72 JP2.2
N$27
  Bottom 0.61: JP3.1 53.15,58.19 JP2.1
N$28
  Bottom 0.61: JP11.5 71.14,55.66 71.14,55.67 JP4.5
N$29
  Bottom 0.61: JP11.2 69.64,63.28 JP4.2
N$30
  Bottom 0.61: JP4.1 JP11.1
N$31
  Top 0.356: JP11.3 71.14,60.74
  Bottom 0.61: JP11.3 | JP4.3 JP11.3
N$32
  Top 0.305: L.R1.1 91.1,68.15 90.51,68.15 | L.R2.2 88.98,68.15 90.51,68.15 | 90.51,68.15 90.51,63.64 91.69,62.44 L.SW1.5
N$33
  Top 0.305: L.R2.1 88.71,69.88 87.59,69.88 | 87.59,69.88 86.42,69.88 L.R3.2 | 87.59,69.88 87.59,67.82 89.83,65.6 89.83,60.88 L.SW1.6
N$34
  Top 0.305: L.SW1.3 80.07,60.14 82.08,62.15 82.08,67.47 83.04,68.43 L.R4.2 L.R3.1
N$35
  Top 0.305: L.SW1.2 80.17,62.44 81.37,63.64 81.37,68.07 L.R5.2
N$36  (1 unrouted)
  Top 0.305: L.SW1.1 79.85,65.24 76.9,68.2 G.J1.5 | L.R6.1 79.89,54.85 78.42,56.33 78.42,63.74 79.9,65.22
N$37
  Top 0.305: L.R4.1 83.75,70.14 83.73,70.18 83.72,70.13 L.R5.1
N$38
  Bottom 0.305: JP5.5 4.9,44.02 6.49,42.43 6.49,40.81 8.98,38.32 K.R3.1
N$39
  Top 0.305: K.R6.2 9.18,46.09 JP5.4
  Bottom 0.305: JP5.4 4.9,41.23 8.85,37.28 12.56,37.28 K.R2.2 13.98,38.3 K.R4.1
N$40
  Bottom 0.305: K.R4.2 17.52,38.68 18.65,39.81 18.65,41.38 17.86,42.17 16.84,42.17 J1.5
N$41
  Bottom 0.305: J1.4 14.4,40.57 12.15,38.32 K.R3.2
N$42
  Bottom 0.305: K.R5.2 9.8,46.68 J1.3
N$43
  Bottom 0.305: J1.2 11.24,40.57 8.9,42.91 K.R1.2
N$44
  Top 0.305: B.U11A.7 7.49,13.37 B.R12A.2
N$45  (via drill 0.35)
  Top 0.305: B.U11A.6 9.2,16.41 v9.44,16.18 | v14.88,20.83 14.88,22.18 B.R11A.2
  Bottom 0.305: v9.44,16.18 9.93,16.18 14.58,20.83 v14.88,20.83
N$46
  Top 0.254: B.T11A.G 16.88,11.29 15.1,11.29 B.R13A.1 14.88,11.51 9.51,11.51 8.97,12.05 8.97,13.23 10.68,14.94 12.48,14.94 B.U11A.8
N$47
  Top 0.305: B.U11C.7 55.49,13.37 B.R12C.2
N$48
  Top 0.254: B.C11A.1 20.62,12.58 | B.C11B.1 44.62,12.58 | B.C11C.1 68.62,12.58 | B.C11D.1 92.62,12.58
  Top 0.508: B.R14A.1 20.77,12.73 B.C11A.1 | B.R14B.1 44.77,12.73 B.C11B.1 | B.R14C.1 68.77,12.73 B.C11C.1 | B.R14D.1 92.77,12.73 B.C11D.1
  Top 0.61: 20.62,12.58 22.95,12.58 B.J11.3 | B.C11A.1 20.04,12.5 18.78,11.24 B.T11A.S | 44.62,12.58 46.95,12.58 B.J4.3 | B.C11B.1 44.03,12.5 42.78,11.24 B.T11B.S | 68.62,12.58 70.95,12.58 B.J8.3 | B.C11C.1 68.03,12.5 66.78,11.24 B.T11C.S | 92.62,12.58 94.95,12.58 B.J16.3 | B.C11D.1 92.03,12.5 90.78,11.24 B.T11D.S
  Bottom 0.61: B.J11.3 24.52,12.73 25.22,12.04 25.22,8.18 26.19,7.21 30.35,7.21 31.42,6.14 39.38,6.14 45.97,12.73 B.J4.3 48.52,12.73 49.22,12.04 49.22,8.18 50.19,7.21 54.35,7.21 55.42,6.14 63.38,6.14 69.97,12.73 B.J8.3 72.52,12.73 73.22,12.04 73.22,8.18 74.19,7.21 78.35,7.21 79.42,6.14 87.38,6.14 93.97,12.73 B.J16.3
N$49
  Top 0.305: B.U11B.7 31.49,13.37 B.R12B.2
N$50  (via drill 0.35)
  Top 0.305: B.U11B.6 33.2,16.41 v33.44,16.18 | v38.88,20.83 38.88,22.18 B.R11B.2
  Bottom 0.305: v33.44,16.18 33.93,16.18 38.58,20.83 v38.88,20.83
N$51
  Top 0.254: B.T11B.G 40.88,11.29 39.1,11.29 B.R13B.1 38.88,11.51 33.51,11.51 32.97,12.05 32.97,13.23 34.68,14.94 36.48,14.94 B.U11B.8
N$52  (via drill 0.35)
  Top 0.305: B.U11C.6 57.2,16.41 v57.44,16.18 | v62.88,20.83 62.88,22.18 B.R11C.2
  Bottom 0.305: v57.44,16.18 57.93,16.18 62.58,20.83 v62.88,20.83
N$53
  Top 0.254: B.T11C.G 64.88,11.29 63.1,11.29 B.R13C.1 62.88,11.51 57.51,11.51 56.97,12.05 56.97,13.23 58.68,14.94 60.48,14.94 B.U11C.8
N$55
  Top 0.305: B.U11D.7 79.49,13.37 B.R12D.2
N$56  (via drill 0.35)
  Top 0.305: B.U11D.6 81.2,16.41 v81.44,16.18 | v86.88,20.83 86.88,22.18 B.R11D.2
  Bottom 0.305: v81.44,16.18 81.93,16.18 86.58,20.83 v86.88,20.83
N$57
  Top 0.254: B.T11D.G 88.88,11.29 87.1,11.29 B.R13D.1 86.88,11.51 81.51,11.51 80.97,12.05 80.97,13.23 82.68,14.94 84.48,14.94 B.U11D.8
PA1  (via drill 0.35)
  Top 0.305: B.U11A.13 11.31,21.5 v10.08,20.26
  Bottom 0.305: v10.08,20.26 4.99,20.26 B.J12.5
PA2  (via drill 0.35)
  Top 0.305: B.U11A.4 6.43,18.95 5.28,17.81 B.J12.4 | B.R11A.1 16.44,20.91 v16.43,20.9
  Bottom 0.305: v16.43,20.9 16.43,20.97 15.73,21.67 12.87,21.67 10.5,19.3 6.39,19.3 B.J12.4
PA3
  Top 0.305: D.R1.2 33.18,56.65 D.D1.1
  Bottom 0.254: 32.02,59.35 D.T2.D
  Bottom 0.305: 32.16,57.73 D.R6.1 | 32.4,55.95 D.D1.1 32.16,56.27 D.R6.1 | D.T2.D 32.16,59.73 D.R6.1
PA4
  Top 0.305: B.U11A.5 7.47,17.7 6.63,17.7 4.9,15.97 B.J12.3 4.9,14.62 6.22,13.3 6.22,12.68 B.R12A.1
PA5  (via drill 0.35)
  Top 0.305: B.U11B.13 35.31,21.5 v34.08,20.26
  Bottom 0.305: v34.08,20.26 28.99,20.26 B.J1.5
PA6
  Top 0.356: D.U3.1 31.21,63.11 30.46,63.11 30.22,63.35 30.22,63.95 28.9,65.27 D.J2.4
PA7
  Top 0.305: D.J2.3 28.9,63.01
  Top 0.356: 28.9,63.01 30.18,61.72 31.3,61.72 D.U3.2
PA8  (via drill 0.35)
  Top 0.305: B.U11B.4 30.43,18.95 29.28,17.81 B.J1.4 | B.R11B.1 40.44,20.91 v40.43,20.9
  Bottom 0.305: v40.43,20.9 40.43,20.97 39.73,21.67 36.87,21.67 34.5,19.3 30.39,19.3 B.J1.4
PA9
  Top 0.305: B.U11B.5 31.47,17.7 30.63,17.7 28.9,15.97 B.J1.3 28.9,14.62 30.22,13.3 30.22,12.68 B.R12B.1
PA10  (via drill 0.35)
  Top 0.305: B.U11C.13 59.31,21.5 v58.08,20.26
  Bottom 0.305: v58.08,20.26 52.99,20.26 B.J5.5
PA11  (via drill 0.35)
  Top 0.305: B.U11C.4 54.43,18.95 53.28,17.81 B.J5.4 | B.R11C.1 64.44,20.91 v64.43,20.9
  Bottom 0.305: v64.43,20.9 64.43,20.97 63.73,21.67 60.87,21.67 58.5,19.3 54.39,19.3 B.J5.4
PA12
  Top 0.305: B.U11C.5 55.47,17.7 54.63,17.7 52.9,15.97 B.J5.3 52.9,14.62 54.22,13.3 54.22,12.68 B.R12C.1
PA13  (via drill 0.35)
  Top 0.305: B.U11D.13 83.31,21.5 v82.08,20.26
  Bottom 0.305: v82.08,20.26 76.99,20.26 B.J9.5
PA14  (via drill 0.35)
  Top 0.305: B.U11D.4 78.43,18.95 77.28,17.81 B.J9.4 | B.R11D.1 88.44,20.91 v88.43,20.9
  Bottom 0.305: v88.43,20.9 88.43,20.97 87.73,21.67 84.87,21.67 82.5,19.3 78.39,19.3 B.J9.4
PA15
  Top 0.305: B.U11D.5 79.47,17.7 78.63,17.7 76.9,15.97 B.J9.3 76.9,14.62 78.22,13.3 78.22,12.68 B.R12D.1
PROG  (via drill 0.35)
  Top 0.305: C.U1.IO0 7.82,68.08 7.83,68.09 8.36,68.09 8.62,67.83 8.62,62.95 9.37,62.24 v9.85,62.24
  Bottom 0.254: U1.23 12.02,62.68 10.39,62.68 9.98,62.24 v9.85,62.24
RESET  (via drill 0.35)
  Top 0.305: C.U1.EN 17.99,57.08 16.59,55.69 14.09,55.69 11.59,58.18 v11.59,59.79
  Bottom 0.254: U1.19 11.99,60.65 11.66,60.65
  Bottom 0.305: 11.66,60.65 11.66,59.86 v11.59,59.79
RX  (via drill 0.35)
  Top 0.305: C.U1.TXD0 7.51,58.06 8.48,58.06 v9.85,59.45
  Bottom 0.254: U1.20 12.02,61.19 11.45,61.19 9.85,59.59 v9.85,59.45
SCL
  Top 0.305: C.U1.IO22 6.54,57.08 6.18,57.43 5.81,57.78 5.31,57.78 C.J2.1
  Bottom 0.254: C.R1.1 5.23,57.91 C.J2.1
SCL1
  Top 0.356: D.U3.4 29.91,59.2 D.J2.1
SCL2
  Top 0.305: B.U11A.12 14.01,20.23 14.37,19.87 15.05,19.87 16.54,18.38 16.54,16.53 B.J14.3 16.52,13.97 11.45,13.97 10.21,12.73 B.J13.2 | B.U11B.12 38.01,20.23 38.37,19.87 39.05,19.87 40.54,18.38 40.54,16.53 B.J3.3 40.52,13.97 35.45,13.97 34.21,12.73 B.J2.2 | B.J12.1 5.64,10.19 10.01,5.82 25.22,5.82 26.89,7.5 26.89,9.76 27.32,10.19 B.J1.1 29.64,10.19 34.01,5.82 49.22,5.82 50.89,7.5 50.89,9.76 51.33,10.19 B.J5.1 53.64,10.19 58.01,5.82 73.22,5.82 74.89,7.5 74.89,9.76 75.33,10.19 B.J9.1 | B.U11C.12 62.01,20.23 62.37,19.87 63.05,19.87 64.54,18.38 64.54,16.53 B.J7.3 64.52,13.97 59.45,13.97 58.21,12.73 B.J6.2 | B.U11D.12 86.01,20.23 86.36,19.87 87.05,19.87 88.54,18.38 88.54,16.53 B.J15.3 88.52,13.97 83.45,13.97 82.21,12.73 B.J10.2
  Bottom 0.305: B.J12.1 7.44,12.73 B.J13.2 | B.J1.1 31.44,12.73 B.J2.2 | B.J5.1 55.44,12.73 B.J6.2 | B.J9.1 79.44,12.73 B.J10.2
SDA
  Top 0.305: C.U1.IO21 5.6,60.08 C.J2.2
  Bottom 0.254: C.R2.1 5.1,60.93 C.J2.2
SDA1
  Top 0.305: 31.31,60.48 D.U3.3
  Top 0.356: D.U3.3 29.4,60.47 29.28,60.35 D.J2.2
SDA2
  Top 0.305: B.U11A.11 14.12,18.95 B.J14.2 | B.U11B.11 38.12,18.95 B.J3.2 | B.J12.2 6.33,11.3 6.33,10.38 10.4,6.3 24.67,6.3 25.08,6.71 25.08,10.74 27.07,12.73 B.J1.2 30.33,11.3 30.33,10.38 34.4,6.3 48.67,6.3 49.08,6.71 49.08,10.74 51.07,12.73 B.J5.2 54.33,11.3 54.33,10.38 58.4,6.3 72.67,6.3 73.08,6.71 73.08,10.74 75.07,12.73 B.J9.2 | B.U11C.11 62.12,18.95 B.J7.2 | B.U11D.11 86.12,18.95 B.J15.2
  Bottom 0.305: B.J14.2 15.27,17.68 13.97,16.39 13.97,15.21 12.74,13.97 12.16,13.97 11.44,13.25 | B.J12.2 6.15,12.73 7.39,13.97 10.71,13.97 11.44,13.25 | 11.44,13.25 11.44,11.48 B.J13.3 | B.J3.2 39.27,17.68 37.98,16.39 37.98,15.21 36.74,13.97 36.16,13.97 35.44,13.25 | B.J1.2 30.15,12.73 31.39,13.97 34.71,13.97 35.44,13.25 | 35.44,13.25 35.44,11.48 B.J2.3 | B.J7.2 63.27,17.68 61.98,16.39 61.98,15.21 60.74,13.97 60.16,13.97 59.44,13.25 | B.J5.2 54.15,12.73 55.39,13.97 58.71,13.97 59.44,13.25 | 59.44,13.25 59.44,11.48 B.J6.3 | B.J15.2 87.27,17.68 85.97,16.39 85.97,15.21 84.74,13.97 84.16,13.97 83.44,13.25 | B.J9.2 78.15,12.73 79.39,13.97 82.71,13.97 83.44,13.25 | 83.44,13.25 83.44,11.48 B.J10.3
STAT1
  Bottom 0.305: D.U4.3 35.09,65.59 34.51,65 34.51,62.87 34.51,62.86 34.51,59.03 34.87,58.67 34.87,56.1 D.D1.2
TX  (via drill 0.35)
  Top 0.305: C.U1.RXD0 8.16,59.09 9.8,60.73 v9.85,60.82
  Bottom 0.254: U1.21 10.79,61.71 9.9,60.82 v9.85,60.82
UPDI
  Top 0.305: B.U11A.10 12.46,17.45 11.43,17.45 11.04,17.07 11.04,16.23 8.39,13.58 8.39,9.19 10.64,6.94 22.39,6.94 B.J11.5
UPDI1
  Top 0.305: B.U11B.10 36.46,17.45 35.42,17.45 35.04,17.07 35.04,16.23 32.39,13.58 32.39,9.19 33.93,7.65 B.J4.5
UPDI2
  Top 0.305: B.U11C.10 60.46,17.45 59.42,17.45 59.04,17.07 59.04,16.23 56.39,13.58 56.39,9.19 58.64,6.94 70.39,6.94 B.J8.5
UPDI3
  Top 0.305: B.U11D.10 84.46,17.45 83.42,17.45 83.04,17.07 83.04,16.23 80.39,13.58 80.39,9.19 81.93,7.65 B.J16.5
VBAT
  Bottom 0.61: B.J11.2 24.7,15.27 26.13,13.84 26.13,8.59 26.73,7.99 30.87,7.99 31.78,7.08 38.91,7.08 B.J4.2 48.7,15.27 50.13,13.84 50.13,8.59 50.73,7.99 54.87,7.99 55.78,7.08 62.91,7.08 B.J8.2 72.7,15.27 74.13,13.84 74.13,8.59 74.73,7.99 78.87,7.99 79.78,7.08 86.91,7.08 B.J16.2
VBATF
  Top 0.813: D.J3.2 45.96,64.41 45,64.41 D.F2.2
VCC  (via drill 0.35)
  Top 0.406: 20.5,56.06 C.U1.3V3 | 21.95,56.63 v21.97,56.63 21.97,56.49 22.46,56 C.C1.1
  Top 0.508: C.U1.3V3 21.45,56.08 21.97,56.59 v21.97,56.63
  Bottom 0.254: 7.48,55.88 C.R1.2 | 7.51,59.22 C.R2.2
  Bottom 0.305: 22.04,55.69 21.74,55.99 17.19,55.99 16.89,55.69 8.94,55.69 8.43,56.21 | C.F2.1 20.88,58.21 21.2,57.88 | C.R1.2 8.43,56.21 | 8.43,56.21 8.39,56.24 8.39,58.54 8.07,58.87 7.88,58.87 C.R2.2
  Bottom 0.508: 22.04,55.69 22.04,55.28 C.C3.1 22.01,55.31 22.01,56.59 v21.97,56.63 21.2,57.39 21.2,57.88 | 20.57,58.71 C.F2.1
  Bottom 0.61: 20.57,58.71 20.02,58.71 18.74,59.99 D.L1.2 18.15,59.99 16.7,58.54 16.06,58.54 D.U2.BP
VCC1  (via drill 0.35)
  Top 0.254: D.C1.2 39.64,58.57 39.72,58.49
  Top 0.305: D.R4.1 37.71,53.73 37.42,53.73 36.64,54.5 v36.52,54.5 36.85,54.83 36.85,56.76 38.42,58.34 D.C1.2 39.51,58.57 | 38.82,66.39 v38.57,66.64
  Top 0.356: D.C1.2 38.38,58.61
  Top 0.61: D.C1.2 38.2,58.8 37.81,58.8 37.38,59.22 36.76,59.22 D.U3.5 | 39.49,66.39 v39.44,66.41 | 39.72,58.49 39.62,58.49
  Top 0.813: 39.49,66.39 39.69,66.2 39.69,58.59 38.45,58.59 D.C1.2 | D.F1.1 41.94,58.57 39.51,58.57 | v39.44,66.41 38.82,66.39
  Bottom 0.305: v36.52,54.5 36.47,54.45 32.34,54.45 30.86,55.93 30.86,61.86 D.T2.G
  Bottom 0.356: v39.44,66.41 39.44,66.39
  Bottom 0.61: D.L2.2 40.78,67.46 41.09,67.15 D.U1.BP | 40.31,68.5 D.L2.2 | D.C7.2 39.41,68.4 39.39,68.37 | 39.39,68.37 40.44,68.37 D.L2.2 | 39.31,68.29 39.39,68.37
  Bottom 0.813: 39.31,68.29 39.31,66.39 38.82,66.39 v38.57,66.64
VCC2
  Top 0.305: L.R6.2 91.4,54.85 93.81,57.25 93.81,59.71 94.82,60.73 G.J2.3
  Bottom 0.305: G.J2.3 94.59,60.22 L.C1.2
VCC3  (via drill 0.35)
  Top 0.305: K.R6.1 17.29,46.09 v17.75,45.64
  Bottom 0.305: K.C1.1 20.54,38.69 21.14,38.69 I.J3.3 | K.R2.1 18.04,37.08 19.63,38.66 19.91,38.66 K.C1.1 | v17.75,45.64 20.24,43.15 K.C1.1
VCC4  (via drill 0.35)
  Top 0.254: B.T11A.D 17.57,12.93 | B.J13.1 12.93,12.93
  Top 0.508: B.U11A.1 9.43,22.77 v9.77,22.42 | B.T11A.D 18.59,13.19 19.31,13.91 19.31,15.44 19.94,16.07 20.49,16.07 B.R14A.2
  Top 0.61: 17.57,12.93 12.93,12.93
  Bottom 0.356: 16.54,17.15 16.54,18.54
  Bottom 0.508: B.J13.1 B.J14.4 15.27,15.88 16.54,17.15 | v9.77,22.42 v9.78,22.43 16.43,22.43 17.39,21.46 17.39,19.39 16.54,18.54
VCC5  (via drill 0.35)
  Top 0.254: B.T11B.D 41.57,12.93 | B.J2.1 36.93,12.93
  Top 0.508: B.U11B.1 33.43,22.77 v33.77,22.42 | B.T11B.D 42.59,13.19 43.31,13.91 43.31,15.44 43.94,16.07 44.49,16.07 B.R14B.2
  Top 0.61: 41.57,12.93 36.93,12.93
  Bottom 0.356: 40.54,17.15 40.54,18.54
  Bottom 0.508: B.J2.1 B.J3.4 39.27,15.88 40.54,17.15 | v33.77,22.42 v33.78,22.43 40.42,22.43 41.39,21.46 41.39,19.39 40.54,18.54
VCC6  (via drill 0.35)
  Top 0.254: B.T11C.D 65.57,12.93 | B.J6.1 60.93,12.93
  Top 0.508: B.U11C.1 57.43,22.77 v57.77,22.42 | B.T11C.D 66.59,13.19 67.31,13.91 67.31,15.44 67.94,16.07 68.49,16.07 B.R14C.2
  Top 0.61: 65.57,12.93 60.93,12.93
  Bottom 0.356: 64.54,17.15 64.54,18.54
  Bottom 0.508: B.J6.1 B.J7.4 63.27,15.88 64.54,17.15 | v57.77,22.42 v57.78,22.43 64.42,22.43 65.39,21.46 65.39,19.39 64.54,18.54
VCC7  (via drill 0.35)
  Top 0.254: B.T11D.D 89.57,12.93 | B.J10.1 84.93,12.93
  Top 0.508: B.U11D.1 81.43,22.77 v81.77,22.42 | B.T11D.D 90.59,13.19 91.31,13.91 91.31,15.44 91.94,16.07 92.49,16.07 B.R14D.2
  Top 0.61: 89.57,12.93 84.93,12.93
  Bottom 0.356: 88.54,17.15 88.54,18.54
  Bottom 0.508: B.J10.1 B.J15.4 87.27,15.88 88.54,17.15 | v81.77,22.42 v81.78,22.43 88.42,22.43 89.39,21.46 89.39,19.39 88.54,18.54
VMOT  (via drill 0.35)
  Top 0.813: D.F2.1 44.72,62.71 v44.72,61.38 42.89,61.38 D.D2.K
  Bottom 0.305: D.U1.VIN 43.14,63.05
  Bottom 0.356: 43.19,63.01 43,63.2 D.U1.VIN
  Bottom 0.61: 43.12,61.71 D.R7.1
  Bottom 0.813: D.R7.1 42.9,61.49 42.9,60.72 42.45,60.26 40.44,60.26 39.98,60.72 39.98,64.16 39.58,64.56 D.T1.S | v44.72,61.38 44.59,61.51 43.32,61.51 43.14,61.69 43.14,63.05 | v44.72,61.38 43.46,61.38 43.12,61.71 | D.C2.2 44.62,61.48 v44.72,61.38
VUSB  (via drill 0.35)  (4 unrouted)
  Top 0.508: v18.33,65.48 18.33,65.44 v18.33,63.28 18.33,59.7 15.16,56.55 v14.67,56.55
  Top 0.61: v16.93,69.31 16.93,69.29 18.33,67.89 v18.33,65.48
  Bottom 0.254: 13.28,56.73 D.U2.VIN | C.F1.1 20.63,65.48 | 15.76,63.16 16.39,63.16
  Bottom 0.305: 11.54,65.17 11.54,65.18 U$1.A4B9 | D.U2.VIN 11.7,56.66 C.R3.2 | 15.7,62.78 15.7,63.01
  Bottom 0.508: 15.8,63.05 16.66,63.05 16.89,63.28 v18.33,63.28 | v14.67,56.55 14.6,56.62 13.38,56.62 D.U2.VIN
  Bottom 0.61: 18.34,65.49 v18.33,65.48 18.33,65.34 17.8,64.81 16.69,64.81 16.44,65.06 U$1.B4A9 | 11.54,65.34 11.54,65.17 11.54,65.07 11.26,64.79 7.51,64.79 C.C5.2 7.3,65 7.3,67.92 8.78,69.4 16.84,69.4 v16.93,69.31
  Bottom 0.813: 18.34,65.48 v18.33,65.48 20.63,65.48
VUSB1  (via drill 0.35)
  Top 0.813: D.J3.1 46.8,66.11 43.26,66.11 42.45,65.31 42.45,65.08 | 42.45,65.08 D.D2.A | v44.62,59.8 41.42,59.8 40.96,60.26 40.96,63.59 42.45,65.08
  Bottom 0.305: D.U4.2 35.88,66.1 | 35.83,66.59 D.U4.1 | D.U4.1 35.88,66.31 34.87,66.31 33.9,65.34 33.9,57.89 D.R6.2 | D.U4.2 36.13,66.34 | 35.88,66.3 35.88,66.29 | 35.88,66.29 35.88,66.1 | 35.88,66.1 D.U4.2 | D.U4.1 35.88,66.29
  Bottom 0.356: 37.15,62.63 D.C4.2
  Bottom 0.508: 39.47,58.02 39.47,59 | 39.48,59.28 44.23,59.28
  Bottom 0.61: 37.27,61.57 D.C4.2 37.17,61.42 | D.T1.G 37.68,65.07 | v44.62,59.8 44.36,59.8 | 39.47,59.41 39.47,59.26 | U$2.B4A9 39.47,59 39.47,59.26 | 39.47,59.26 39.48,59.28 | 44.23,59.28 44.36,59.14 44.37,59.13 U$2.A4B9
  Bottom 0.813: 37.2,61.3 D.C4.2 | 44.36,59.8 44.36,59.14 | 39.47,59.41 38.61,60.27 37.48,60.27 37.25,60.49 37.25,61.25 D.C4.2 | D.C4.2 37.34,61.55 37.34,64.17 37.68,64.51 D.T1.G 37.68,65.72 37.06,66.34 36.13,66.34 | v43.65,59.81 v44.62,59.81 v44.62,59.8
VUSB2
  Bottom 0.61: B.J11.1 24.67,17.81 27,15.49 27,9.09 27.29,8.79 31.43,8.79 32.23,7.99 38.35,7.99 45.52,15.17 45.52,16.01 47.1,17.59 B.J4.1 48.67,17.81 50.99,15.49 50.99,9.09 51.29,8.79 55.43,8.79 56.23,7.99 62.35,7.99 69.53,15.17 69.53,16.01 71.1,17.59 B.J8.1 72.67,17.81 75,15.49 75,9.09 75.29,8.79 79.43,8.79 80.23,7.99 86.35,7.99 93.53,15.17 93.53,16.01 95.1,17.59 B.J16.1

## Text on the board
tPlace: + | − | power M4 | proto | M.4 | 5wSwitch M4 | meteo / M.4
bPlace: main M.4 | GND | GND | GND | GND | PA3 | PA3 | PA3 | PA3 | PA6 | VUSB | PA6 | VUSB | PA6 | VUSB | PA6 | VUSB | PA7 | VBAT | PA7 | VBAT | PA7 | VBAT | PA7 | VBAT | SDA | 3V3 | SDA | 3V3 | SDA | 3V3 | SDA | 3V3 | SCL | GND | SCL | GND | SCL | GND | SCL | GND | UPDI | UPDI | UPDI | UPDI | adapter 414 M.4 | adapter 414 M.4 | adapter 414 M.4 | adapter 414 M.4
tNames: Hugo M4